# EAGLE board Untitled (EAGLE 7.2.0)
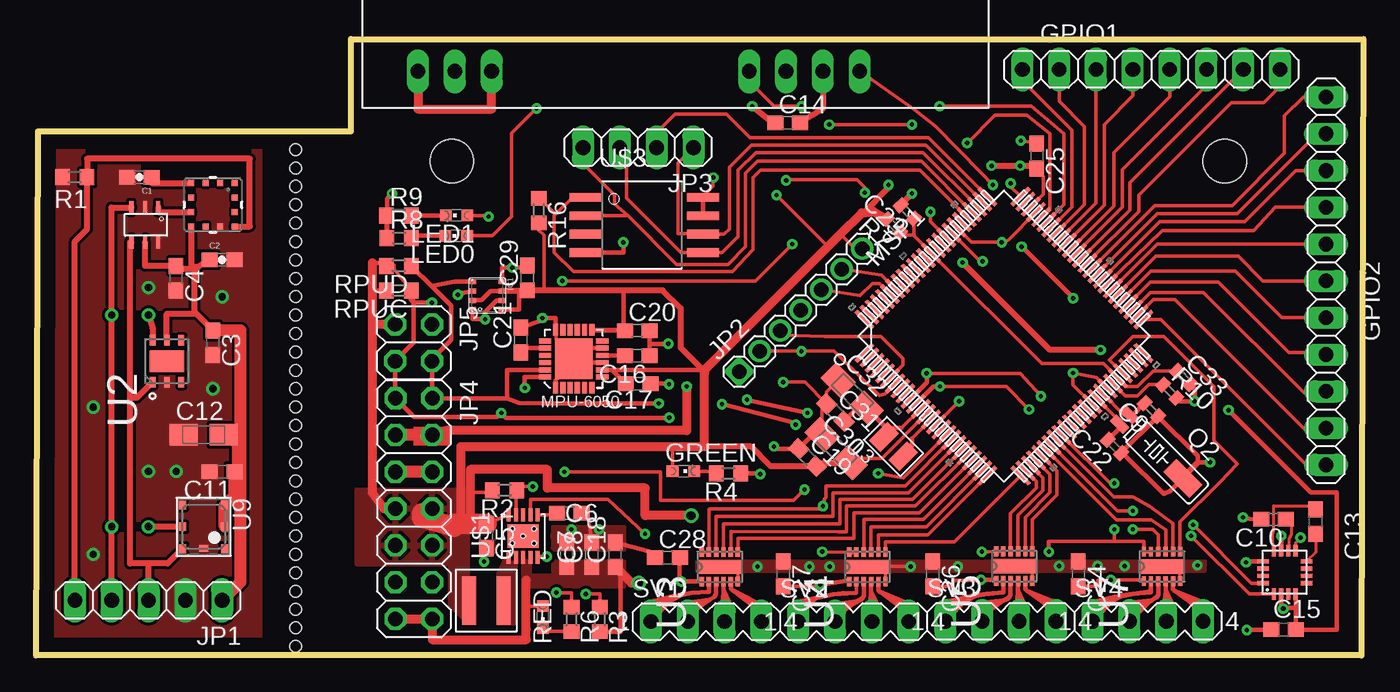
[diagram p0: board, top side]
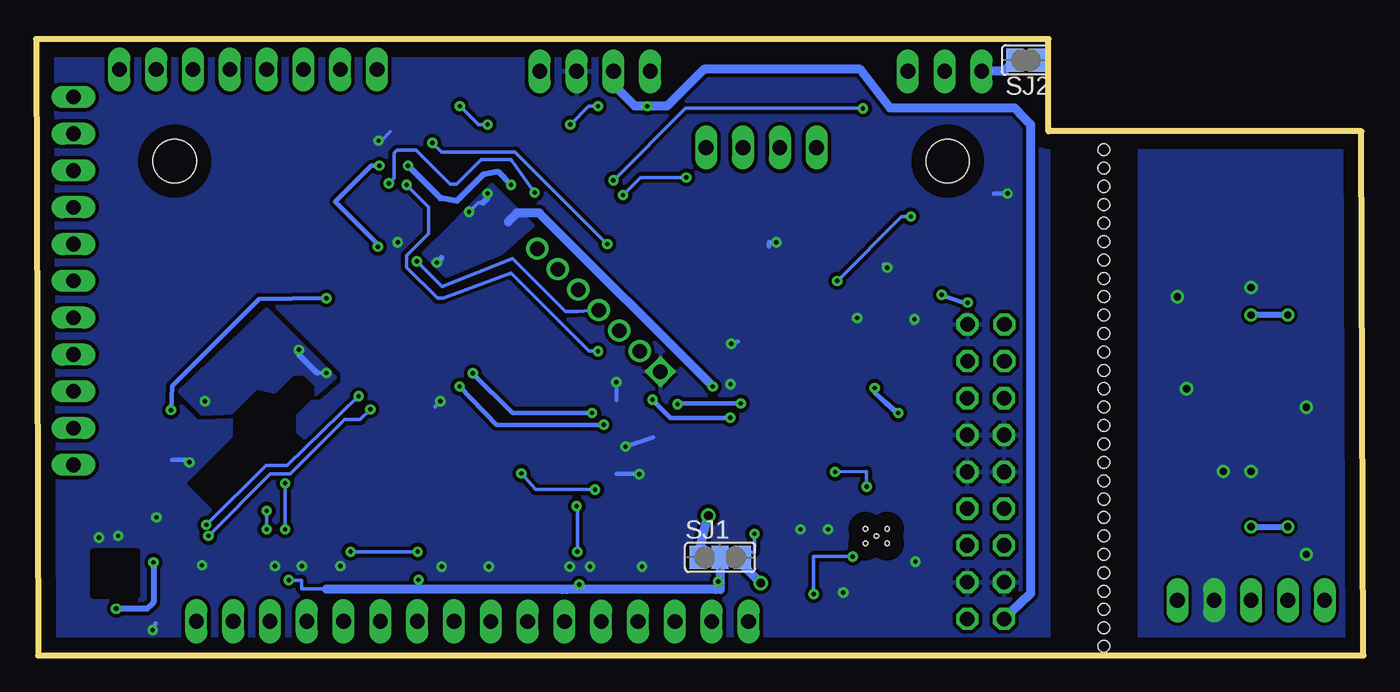
[diagram p1: board, bottom side, seen from below]

Size 91.57 x 42.54 mm. Coordinates in mm from the lower left corner, seen from the top.
Outline: 0,0 0.13,36.2 21.72,36.2 21.72,42.54 91.57,42.54 91.44,0 0,0
Copper layers (1*16): Top 0.035mm / dielectric 1.5mm / Bottom 0.035mm
Design rules "default": minimum track width 10mil, minimum drill 24mil, track to track 8mil, track to pad 8mil, pad to pad 8mil, via to via 8mil, smd to smd 8mil, copper to edge 40mil, drill to drill 8mil, minimum pad ring 10mil, minimum via ring 8mil, stop-mask expansion 4mil, vias tented up to drill 0mil, thermal gap 10mil
Net classes: 0 default: width 0.254 mm; 1 power: width 0.203 mm, drill 0.305 mm, clearance 0.152 mm; 2 VIN: width 0.203 mm, drill 0.305 mm, clearance 0.152 mm; 3 fine: width 0.406 mm, drill 0.61 mm, clearance 0.152 mm
Holes 3 mm at 28.68,34.11 82.02,34.11
Holes 0.8 mm at 17.91,0.64 17.91,1.91 17.91,3.17 17.91,4.45 17.91,5.71 17.91,6.98 17.91,8.26 17.91,9.53 17.91,10.79 17.91,12.06 17.91,13.33 17.91,14.61 17.91,15.88 17.91,17.15 17.91,18.42 17.91,19.69 17.91,20.96 17.91,22.23 17.91,23.5 17.91,24.77 17.91,26.04 17.91,27.31 17.91,28.58 17.91,29.85 17.91,31.12 17.91,32.38 17.91,33.66 17.91,34.92
bRestrict: area 84.6,4.2 to 87.6,7.2

## Footprints (pad centres in the part's own frame; a part is rotated, then mirrored left to right if it is on the bottom)
0603-CAP = smd 1.1 x 1: 1 -0.85,0; 2 0.85,0
C0603 = smd 1.1 x 1: 1 -0.85,0; 2 0.85,0
C0402 = smd 0.7 x 0.9: 1 -0.65,0; 2 0.65,0
A/3216-18R = smd 1.95 x 1.5: + 1.375,0; - -1.375,0
LPCC16 = smd 0.8 x 0.3: 1 -1.5,0.75; 2 -1.5,0.25; 3 -1.5,-0.25; 4 -1.5,-0.75; 9 1.5,-0.75; 10 1.5,-0.25; 11 1.5,0.25; 12 1.5,0.75 | smd 0.3 x 0.8: 5 -0.75,-1.5; 6 -0.25,-1.5; 7 0.25,-1.5; 8 0.75,-1.5; 13 0.75,1.5; 14 0.25,1.5; 15 -0.25,1.5; 16 -0.75,1.5
1X08 = drill 1.016 long: 1 -8.89,0; 2 -6.35,0; 3 -3.81,0; 4 -1.27,0; 5 1.27,0; 6 3.81,0; 7 6.35,0; 8 8.89,0
1X11 = drill 1.016 long: 1 -12.7,0; 2 -10.16,0; 3 -7.62,0; 4 -5.08,0; 5 -2.54,0; 6 0,0; 7 2.54,0; 8 5.08,0; 9 7.62,0; 10 10.16,0; 11 12.7,0
CHIPLED_0603 = smd 0.8 x 0.8: A 0,-0.75; C 0,0.75
BME280 = smd 0.35 x 0.5: 1 0.975,-1.025; 2 0.325,-1.025; 3 -0.325,-1.025; 4 -0.975,-1.025; 5 -0.975,1.025; 6 -0.325,1.025; 7 0.325,1.025; 8 0.975,1.025
1X05 = drill 1.016 long: 1 -5.08,0; 2 -2.54,0; 3 0,0; 4 2.54,0; 5 5.08,0
1:07X2MM = drill 1.016 pad 1.3 square: 1 0,0 | drill 1.016 pad 1.3: 2 4,0; 3 2,0; 4 6,0; 5 8,0; 6 10,0; 7 12,0
1X04 = drill 1.016 long: 1 -3.81,0; 2 -1.27,0; 3 1.27,0; 4 3.81,0
2X07 = drill 1.016 octagon: 1 -7.62,-1.27; 2 -7.62,1.27; 3 -5.08,-1.27; 4 -5.08,1.27; 5 -2.54,-1.27; 6 -2.54,1.27; 7 0,-1.27; 8 0,1.27; 9 2.54,-1.27; 10 2.54,1.27; 11 5.08,-1.27; 12 5.08,1.27; 13 7.62,-1.27; 14 7.62,1.27
2X02 = drill 1.016 octagon: 1 -1.27,-1.27; 2 -1.27,1.27; 3 1.27,-1.27; 4 1.27,1.27
XFL4020 = smd 0.965 x 3.353: P$1 -1.181,0; P$2 1.181,0
0806 = smd 1.1 x 1.8: 1 -0.94,0; 2 0.94,0
QFN24 = smd 0.8 x 0.35: 1 -2,1.25; 2 -2,0.75; 3 -2,0.25; 4 -2,-0.25; 5 -2,-0.75; 6 -2,-1.25; 13 2,-1.25; 14 2,-0.75; 15 2,-0.25; 16 2,0.25; 17 2,0.75; 18 2,1.25 | smd 0.35 x 0.85: 7 -1.25,-1.975; 8 -0.75,-1.975; 9 -0.25,-1.975; 10 0.25,-1.975; 11 0.75,-1.975; 12 1.25,-1.975; 19 1.25,1.975; 20 0.75,1.975; 21 0.25,1.975; 22 -0.25,1.975; 23 -0.75,1.975; 24 -1.25,1.975 | smd 2.8 x 2.6: P 0,0
PZ100 = smd 1.676 x 0.279: 1 -7.62,5.994; 2 -7.62,5.512; 3 -7.62,5.004; 4 -7.62,4.496; 5 -7.62,3.988; 6 -7.62,3.505; 7 -7.62,2.997; 8 -7.62,2.489; 9 -7.62,2.007; 10 -7.62,1.499; 11 -7.62,0.991; 12 -7.62,0.508; 13 -7.62,0; 14 -7.62,-0.508; 15 -7.62,-0.991; 16 -7.62,-1.499; 17 -7.62,-2.007; 18 -7.62,-2.489; 19 -7.62,-2.997; 20 -7.62,-3.505; 21 -7.62,-3.988; 22 -7.62,-4.496; 23 -7.62,-5.004; 24 -7.62,-5.512; 25 -7.62,-5.994; 51 7.62,-5.994; 52 7.62,-5.512; 53 7.62,-5.004; 54 7.62,-4.496; 55 7.62,-3.988; 56 7.62,-3.505; 57 7.62,-2.997; 58 7.62,-2.489; 59 7.62,-2.007; 60 7.62,-1.499; 61 7.62,-0.991; 62 7.62,-0.508; 63 7.62,0; 64 7.62,0.508; 65 7.62,0.991; 66 7.62,1.499; 67 7.62,2.007; 68 7.62,2.489; 69 7.62,2.997; 70 7.62,3.505; 71 7.62,3.988; 72 7.62,4.496; 73 7.62,5.004; 74 7.62,5.512; 75 7.62,5.994 | smd 0.279 x 1.676: 26 -5.994,-7.62; 27 -5.512,-7.62; 28 -5.004,-7.62; 29 -4.496,-7.62; 30 -3.988,-7.62; 31 -3.505,-7.62; 32 -2.997,-7.62; 33 -2.489,-7.62; 34 -2.007,-7.62; 35 -1.499,-7.62; 36 -0.991,-7.62; 37 -0.508,-7.62; 38 0,-7.62; 39 0.508,-7.62; 40 0.991,-7.62; 41 1.499,-7.62; 42 2.007,-7.62; 43 2.489,-7.62; 44 2.997,-7.62; 45 3.505,-7.62; 46 3.988,-7.62; 47 4.496,-7.62; 48 5.004,-7.62; 49 5.512,-7.62; 50 5.994,-7.62; 76 5.994,7.62; 77 5.512,7.62; 78 5.004,7.62; 79 4.496,7.62; 80 3.988,7.62; 81 3.505,7.62; 82 2.997,7.62; 83 2.489,7.62; 84 2.007,7.62; 85 1.499,7.62; 86 0.991,7.62; 87 0.508,7.62; 88 0,7.62; 89 -0.508,7.62; 90 -0.991,7.62; 91 -1.499,7.62; 92 -2.007,7.62; 93 -2.489,7.62; 94 -2.997,7.62; 95 -3.505,7.62; 96 -3.988,7.62; 97 -4.496,7.62; 98 -5.004,7.62; 99 -5.512,7.62; 100 -5.994,7.62
MS3V-T1R = smd 0.635 x 1.27: P1 -0.47,-4.43; P2 0.47,-4.43 | smd 1.27 x 2.54: P3 0,1.3
R0603 = smd 1 x 1.1: 1 -0.85,0; 2 0.85,0
R0402 = smd 0.7 x 0.9: 1 -0.65,0; 2 0.65,0
SJ_2 = smd 1.168 x 1.6: 1 -1.524,0; 2 0,0; 3 1.524,0
SJ = smd 1.168 x 1.6: 1 -0.762,0; 2 0.762,0
MA04-1 = drill 1.016 long: 1 -3.81,0; 2 -1.27,0; 3 1.27,0; 4 3.81,0
ML8511 = smd 0.4 x 0.4: 1 -1.5,-1.5; 2 -1.5,-0.5; 3 -1.5,0.5; 4 -1.5,1.5; 5 -0.5,1.5; 6 0.5,1.5; 7 1.5,1.5; 8 1.5,0.5; 9 1.5,-0.5; 10 1.5,-1.5; 11 0.5,-1.5; 12 -0.5,-1.5
DFN300X300X110-7N = smd 0.711 x 0.406: 1 -1.448,0.991; 2 -1.448,0; 3 -1.448,-0.991; 4 1.448,-0.991; 5 1.448,0; 6 1.448,0.991 | smd 1.499 x 2.388: 7 0,0
SON50P200X300X80-13N = smd 0.66 x 0.305: 1 -1.016,1.245; 2 -1.016,0.762; 3 -1.016,0.254; 4 -1.016,-0.254; 5 -1.016,-0.762; 6 -1.016,-1.245; 7 1.016,-1.245; 8 1.016,-0.762; 9 1.016,-0.254; 10 1.016,0.254; 11 1.016,0.762; 12 1.016,1.245 | smd 0.991 x 3.099: 13 0,0
BMP180 = smd 0.6 x 0.5: 1 1.5,1.45; 2 0,1.45; 3 -1.5,1.45; 4 -1.5,-1.45; 5 0,-1.45; 6 1.5,-1.45 | smd 0.5 x 0.6: 7 1.5,0
S-PVSON-N10 = smd 0.28 x 0.825: 1 -1,-1.462; 2 -0.5,-1.462; 3 0,-1.462; 4 0.5,-1.462; 5 1,-1.462; 6 1,1.462; 7 0.5,1.462; 8 0,1.462; 9 -0.5,1.462; 10 -1,1.462 | smd 2.15 x 1.6: EXPAD 0,0 | hole 0.3: -0.75,0.5; 0.75,0.5; 0.75,-0.5; -0.75,-0.5; 0,0
STAR = smd 0.152 x 0.305: AGND 0.635,-0.635; DGND 0.635,0.635 | smd 0.305 x 0.152: GND 0.635,0
SOIC_8-LEAD = smd 0.61 x 2.21: CE -1.905,-2.934; RST/HOLD -0.635,5.156; SCK 0.635,5.156; SI 1.905,5.156; SO -0.635,-2.934; VDD -1.905,5.156; VSS 1.905,-2.934; WP 0.635,-2.934
HX1 = drill 1.016 long: 0V 13.97,0; EN 8.89,0; RFGND -13.97,0; RFGND2 -8.89,0; RFOUT -11.43,0; TXD 16.51,0; VCC 11.43,0
SOT-23-6 = smd 0.305 x 0.9: SCL 2.45,-0.45; SDA 2.45,1.95; VDD 1.5,1.95; VIN+ 0.6,-0.45; VIN- 0.6,1.95; VSS 1.5,-0.45

## Placement (x,y rotation side)
C1  1nF  [0603-CAP]  7.11,33.02 180 top
C2  0.1uF  [0603-CAP]  12.83,27.31 0 top
C3  100n  [C0603]  12.19,21.59 270 top
C4  100n  [C0603]  9.65,26.04 270 top
C5  22uF  [C0603]  31.06,8.24 270 top
C6  10nF  [C0603]  36.77,9.82 0 top
C7  22uF  [C0603]  36.6,6.97 90 top
C8  22uF  [C0603]  38.35,6.97 90 top
C9  12p  [C0402]  76.94,16.97 135 top
C10  4.7u  [C0603]  85.38,9.4 180 top
C11  100n  [C0603]  12.83,12.7 180 top
C12  10u  [A/3216-18R]  11.56,15.24 0 top
C13  220n  [C0603]  88.28,9.25 270 top
C14  100n  [C0603]  51.85,36.77 0 top
C15  100n  [C0603]  86.07,1.78 0 top
C16  100n  [C0603]  41.48,20.7 180 top
C17  10n  [C0603]  41.53,18.77 180 top
C18  3 x 22uF  [C0603]  39.95,6.97 90 top
C19  100n  [C0603]  53.21,13.67 315 top
C20  100n  [C0603]  41.48,22.43 0 top
C21  2.2n  [C0603]  33.45,21.78 90 top
C22  12p  [C0402]  74.4,14.43 135 top
C23  100n  [C0402]  60.11,30.62 135 top
C24  470n  [C0603]  71.91,5.64 270 top
C25  100n  [C0603]  69.04,34.47 270 top
C26  470n  [C0603]  61.85,5.64 270 top
C27  470n  [C0603]  51.54,5.64 270 top
C28  470n  [C0603]  43.56,6.76 0 top
C29  100n  [C0603]  33.9,26.06 90 top
C30  10u  [A/3216-18R]  55.19,14.27 315 top
C31  100n  [C0603]  55.14,16.76 315 top
C32  10u  [A/3216-18R]  56.31,18.03 315 top
C33  100n  [C0402]  79.16,19.19 315 top
COMPASS  HMC5883L  [LPCC16]  86.14,5.75 90 top
GPIO1  A7:A0  [1X08]  76.94,40.46 0 top
GPIO2  A18:A8  [1X11]  89,25.86 270 top
GREEN  3V-ok  [CHIPLED_0603]  44.65,12.73 270 top
IC1  BME280  [BME280]  31.13,24.84 270 top
JP1  [1X05]  7.75,3.81 180 top
JP2  [1:07X2MM]  48.51,19.6 45 top
JP3  SPI  [1X04]  41.54,35.06 180 top
JP4  [2X07]  26.05,10.14 270 top
JP5  [2X02]  26.04,21.59 270 top
L1  1uH  [XFL4020]  31.06,3.79 0 top
L3  4.7uH  [0806]  59.16,14.43 315 top
LED0  LED0  [CHIPLED_0603]  28.98,28.98 90 top
LED1  LED1  [CHIPLED_0603]  29.01,30.38 90 top
MPU-6050  MPU-6050  [QFN24]  37.08,20.47 90 top
MSP1  MSP432  [PZ100]  66.78,22.05 45 top
Q2  32.768kHz  [MS3V-T1R]  78.21,13.16 225 top
R1  10k  [R0603]  2.67,33.02 180 top
R2  1M  [R0603]  32.33,11.41 180 top
R3  1M  [R0603]  38.89,2.49 270 top
R4  1k  [R0603]  47.78,12.57 180 top
R6  1k  [R0603]  36.93,2.51 270 top
R7  0R  [R0402]  59.16,29.67 135 top
R8  1k  [R0603]  25.04,28.8 0 top
R9  1k  [R0603]  25.02,30.38 0 top
R10  91k 0.1% ±25 ppm/°C  [R0402]  78.21,18.24 315 top
R16  10k  [R0603]  34.68,30.72 270 top
RED  5V-ok  [CHIPLED_0603]  34.94,2.65 180 top
RPUC  10k  [R0603]  25.02,25.2 180 top
RPUD  10k  [R0603]  25.02,26.9 180 top
SJ1  3V3 V_Motor 5V  [SJ_2]  44.37,6.78 0 bottom
SJ2  [SJ]  23.28,41.1 180 bottom
SV1  [MA04-1]  46.23,2.34 0 top
SV2  [MA04-1]  56.39,2.34 0 top
SV3  [MA04-1]  66.55,2.36 0 top
SV4  [MA04-1]  76.71,2.36 0 top
U1  ML8511-UV-SENSOR  [ML8511]  12.19,31.12 180 top
U2  SHT21  [DFN300X300X110-7N]  9.02,20.32 90 top
U3  DRV8836DSSR  [SON50P200X300X80-13N]  47.17,6.12 90 top
U4  DRV8836DSSR  [SON50P200X300X80-13N]  57.35,6.12 90 top
U5  DRV8836DSSR  [SON50P200X300X80-13N]  67.49,6.17 90 top
U7  DRV8836DSSR  [SON50P200X300X80-13N]  77.67,6.15 90 top
U9  BMP180  [BMP180]  11.56,8.89 270 top
U$1  TPS61232  [S-PVSON-N10]  33.6,8.24 0 top
U$2  STARGND  [STAR]  27.3,14.5 90 top
U$3  SST25VF064C  [SOIC_8-LEAD]  40.85,29.72 270 top
U$4  HX1  [HX1]  40.31,40.33 0 top
U$5  MCP3425  [SOT-23-6]  9.02,30.48 180 top

## Library data of the parts
C1 = SparkFun-Capacitors; PROD_ID: CAP-07886
C2 = SparkFun-Capacitors; PROD_ID: CAP-00810
C3-C11 C13-C33 R2-R4 R6-R10 R16 RPUC RPUD = rcl
C12 R1 = resistor
COMPASS = HMC5883L
GPIO1 GPIO2 JP3-JP5 = pinhead
GREEN LED0 LED1 RED = adafruit
IC1 = bosch-bme280
JP1 JP2 = Headerlibrary
L1 = Coilcraft; URL: http://www.coilcraft.com/xfl4020.cfm
L3 = Murata
MPU-6050 = seb
MSP1 = MSP-EXP432
Q2 = microcrystal
SJ1 SJ2 = jumper
SV1-SV4 = con-lstb; OC_FARNELL: unknown; OC_NEWARK: unknown
U1 = ML8511
U2 = SENSIRION-SHT21; MPN: SHT21; OC_FARNELL: 1855468; OC_NEWARK: 20T1172; PACKAGE: DFN-6; SUPPLIER: SENSIRION
U3-U5 U7 = DRV8834; MPN: DRV8836DSSR; OC_FARNELL: 2115236; OC_NEWARK: 94T6066; PACKAGE: SON-12; SUPPLIER: TEXAS INSTRUMENTS
U9 = SparkFun-Sensors
U$1 = texasinstruments
U$2 = lpatiny
U$3 = BertaLib
U$4 = Octanis1
U$5 = phMeter

## Nets
3.3V [power]: U$3.WP
5VEN: MSP1.17 R2.1 U$1.9
+3V1 [power]: C5.1 C15.2 C17.2 C19.2 C20.1 C25.2 C29.1 C30.+ COMPASS.2 COMPASS.4 COMPASS.13 GREEN.A IC1.2 IC1.6 IC1.8 JP2.7 JP4.7 JP4.8 JP4.9 JP4.10 JP5.1 L1.P$1 MPU-6050.8 MPU-6050.13 MSP1.13 MSP1.73 R2.2 R7.2 R16.2 RPUC.2 RPUD.2 SJ1.1 U$1.10 U$3.RST/HOLD U$3.VDD
+3V3 [power]: C2.1 C3.1 C4.1 C11.1 C12.+ JP1.1 U1.7 U2.5 U9.2 U9.3 U$5.VDD
+5V [fine]: C7.1 C8.1 C14.1 C18.1 JP4.13 JP4.14 R3.2 RED.A SJ1.3 U$1.3 U$1.4 U$1.7 U$4.VCC
A14: GPIO2.7 MSP1.55
A15: GPIO2.8 MSP1.54
A16: GPIO2.9 MSP1.53
A17: GPIO2.10 MSP1.52
A18: GPIO2.11 MSP1.51
A19: MSP1.50
A20: MSP1.49
A21: MSP1.48
A22: MSP1.47
AGND [power]: C23.2 C33.2 MSP1.40 MSP1.43 MSP1.84 R10.2 U$2.AGND
AVCC1 [VIN]: C23.1 C33.1 MSP1.45 MSP1.87 R7.1
GND: C1.2 C2.2 C3.2 C4.2 C11.2 C12.- JP1.2 R1.2 U1.5 U2.2 U9.7 U$5.VIN- U$5.VSS
GND1 [power]: C5.2 C6.2 C7.2 C8.2 C9.1 C10.2 C14.2 C15.1 C16.1 C17.1 C18.2 C19.1 C20.2 C21.2 C22.1 C24.1 C25.1 C26.1 C27.1 C28.1 C29.2 C30.- C31.1 C32.- COMPASS.9 COMPASS.11 IC1.1 IC1.5 IC1.7 JP2.1 JP4.3 JP4.4 JP4.5 JP4.6 JP4.11 JP4.12 JP5.2 MPU-6050.1 MPU-6050.9 MPU-6050.11 MPU-6050.18 MPU-6050.P MSP1.15 MSP1.72 MSP1.82 Q2.P3 R4.1 R6.1 R8.1 R9.1 SJ2.1 U3.6 U3.13 U4.6 U4.13 U5.6 U5.13 U7.6 U7.13 U$1.EXPAD U$2.DGND U$2.GND U$3.VSS U$4.0V
HX1_EN: MSP1.70 U$4.EN
IND: L1.P$2 U$1.1 U$1.2
LED0: LED0.A MSP1.75
LED1: LED1.A MSP1.71
M1IN1: MSP1.19 U3.10
M1IN2: MSP1.20 U3.9
M2IN1: MSP1.21 U3.8
M2IN2: MSP1.22 U3.7
M3IN1: MSP1.23 U4.10
M3IN2: MSP1.24 U4.9
M4IN1: MSP1.25 U4.8
M4IN2: MSP1.26 U4.7
M5IN1: MSP1.27 U5.10
M5IN2: MSP1.28 U5.9
M6IN1: MSP1.29 U5.8
M6IN2: MSP1.30 U5.7
M7IN1: MSP1.32 U7.10
M7IN2: MSP1.31 U7.9
M8IN1: MSP1.33 U7.8
M8IN2: MSP1.46 U7.7
M1234SLEEP: MSP1.18 U3.11 U3.12 U4.11 U4.12
M5678SLEEP: MSP1.34 U5.11 U5.12 U7.11 U7.12
N$1: U1.8 U$5.VIN+
N$2: R3.1 U$1.5
N$3: C1.1 U1.10
N$4: GREEN.C R4.2
N$5: LED0.C R8.2
N$6: LED1.C R9.2
N$7: C31.2 C32.+ L3.1 MSP1.12
N$8: C22.2 MSP1.41 Q2.P2
N$10: C9.2 MSP1.42 Q2.P1
N$13: SV2.1 U4.2
N$14: GPIO2.1 MSP1.61
N$15: GPIO2.2 MSP1.60
N$17: C10.1 COMPASS.10
N$18: C16.2 MPU-6050.10
N$19: C21.1 MPU-6050.20
N$20: GPIO2.3 MSP1.59
N$21: GPIO2.4 MSP1.58
N$22: GPIO2.5 MSP1.57
N$23: GPIO2.6 MSP1.56
N$25: C13.2 COMPASS.8
N$27: GPIO1.1 MSP1.69
N$28: GPIO1.2 MSP1.68
N$30: GPIO1.3 MSP1.67
N$32: C13.1 COMPASS.12
N$33: MSP1.44 R10.1
N$34: L3.2 MSP1.14
N$35: GPIO1.4 MSP1.66
N$36: GPIO1.5 MSP1.65
N$37: GPIO1.6 MSP1.64
N$38: GPIO1.8 MSP1.62
N$39: SV2.2 U4.3
N$40: SV2.3 U4.4
N$41: SV2.4 U4.5
N$42: C6.1 U$1.6
N$43: GPIO1.7 MSP1.63
N$44: R6.2 RED.C
N$45: SV3.1 U5.2
N$46: SV3.2 U5.3
N$47: SV3.3 U5.4
N$48: SV3.4 U5.5
N$49: SV1.1 U3.2
N$50: SV1.2 U3.3
N$51: SV1.3 U3.4
N$52: SV1.4 U3.5
N$53: SV4.1 U7.2
N$54: SV4.2 U7.3
N$55: SV4.3 U7.4
N$56: SV4.4 U7.5
N$75: JP2.4 MSP1.83
N$76: JP2.6 MSP1.94
N$77: JP2.5 MSP1.95
P1.0/UCA0STE: MSP1.4
P1.1/UCA0CLK: MSP1.5
P1.4/UCB0STE: MSP1.8
P1.5/UCB0CLK: MSP1.9
P2.0/PM_UCA1STE: MSP1.16
P3.3/PM_UCA2TXD/PM_UCA2SIMO: MSP1.35
P3.4/PM_UCB2STE: MSP1.36
P3.5/PM_UCB2CLK: MSP1.37
P3.6/PM_UCB2SIMO/PM_UCB2SDA: MSP1.38
P3.7/PM_UCB2SOMI/PM_UCB2SCL: MSP1.39
P6.7/TA2.4/UCB3SOMI/UCB3SCL/C1.0: MSP1.81
P7.0/PM_SMCLK/PM_DMAE0: MSP1.88
P7.1/PM_C0OUT/PM_TA0CLK: MSP1.89
P7.2/PM_C1OUT/PM_TA1CLK: MSP1.90
P7.3/PM_TA0.0: MSP1.91
P9.2/TA3.3: MSP1.74
P9.4/UCA3STE: MSP1.96
P9.5/UCA3CLK: MSP1.97
P9.6/UCA3RXD/UCA3SOMI: MSP1.98
P9.7/UCA3TXD/UCA3SIMO: MSP1.99
P10.0/UCB3STE: MSP1.100
P10.1/UCB3CLK: MSP1.1
P10.2/UCB3SIMO/UCB3SDA: MSP1.2
P10.3UCB3SOMI/UCB3SCL: MSP1.3
PJ.2/HFXOUT: MSP1.85
PJ.3/HFXIN: MSP1.86
PJ.4/TDI/ADC14CLK: MSP1.92
PJ.5/TDO/SWO: MSP1.93
RFGND [power]: SJ2.2 U$4.RFGND U$4.RFGND2
RX: JP2.2 MSP1.6
SCL: JP1.4 U2.6 U9.5 U$5.SCL
SCL1: COMPASS.1 IC1.4 JP4.2 JP5.4 MPU-6050.23 MSP1.11 RPUD.1
SDA: JP1.3 U2.1 U9.6 U$5.SDA
SDA1: COMPASS.16 IC1.3 JP4.1 JP5.3 MPU-6050.24 MSP1.10 RPUC.1
SPI_EXTSLAVE_TE: JP3.2 MSP1.76
SPI_FLASH_CS: MSP1.80 R16.1 U$3.CE
SPI_MISO: JP3.4 MSP1.79 U$3.SO
SPI_MOSI: JP3.3 MSP1.78 U$3.SI
SPI_SCK: JP3.1 MSP1.77 U$3.SCK
TX: JP2.3 MSP1.7 U$4.TXD
UV_EN: JP1.5 R1.1 U1.4
V_MOTOR [fine]: C24.2 C26.2 C27.2 C28.2 SJ1.2 U3.1 U4.1 U5.1 U7.1

## Tracks (layer width: path | path; a pad name or v marks a point on that pad's centre or on a via)
5VEN  (via drill 0.3)
  Top 0.254: U$1.9 33.1,11.41 R2.1 33.18,11.66 v34.27,11.66 | 36.55,12.72 v36.45,12.67 43.07,12.67 43.07,10.69 52.25,10.69 v53.01,11.46 | MSP1.17 59.84,12.27 v58.09,12.57
  Bottom 0.254: v36.45,12.67 34.27,12.72 v34.27,11.66 | v58.09,12.57 57.12,11.46 v53.01,11.46
+3V1  (via drill 0.3, 0.6)
  Top 0.254: C5.1 U$1.10 | R2.2 31.48,11.25 29.95,11.25 | GREEN.A 43.9,14.39 43.87,14.43 | MSP1.13 58.34,13.61 56.48,13.61 arc90 C30.+ | U$3.RST/HOLD 46,31.67 46.71,32.38 v46.71,32.99 | v51.08,31.78 | v51.08,31.78 54.62,28.23 | JP2.7 56.5,28.08 55.49,29.09 | R7.2 58.27,30.56 57.07,30.56 | MSP1.73 69.49,31.84 69.49,33.06 C25.2 | 54.05,13.3 arc90 C19.2 | 34.89,25.21 35.03,25.35 35.03,29.03 34.68,29.38 R16.2
  Top 0.305: U$3.RST/HOLD U$3.VDD | C20.1 38.38,22.43 MPU-6050.13 40.51,22.47 40.51,25.21 37.86,25.21 34.89,25.21 | C17.2 39.73,19.72 MPU-6050.8 | MPU-6050.8 39.07,19.74 | COMPASS.4 86.89,3.28 | 86.89,3.28 86.89,1.81 C15.2 89.74,1.78 89.74,11.25 87.96,11.25 v82.27,16.94 | COMPASS.2 85.89,3.41 v86.07,3.23 | v83.48,6.43 83.48,6.5 COMPASS.13 | v86.02,3.23 86.02,3.28 86.89,3.28 | 24.15,26.9 RPUD.2 23.97,27.1 23.19,27.1 | RPUC.2 24.17,24.96 23.78,25.2 23.19,25.2 | IC1.6 31.35,25.17 30.72,24.54 30.12,24.54 IC1.2 | IC1.8 33.31,23.87 33.31,25.17 | 45.87,19.84 46.13,19.58 | MPU-6050.8 46.13,19.72 46.13,19.48 | v71.55,24.66 v68,28.22
  Top 0.406: C20.1 40.72,22.52 | IC1.6 33.31,25.17 33.65,25.17 C29.1 40.51,25.21 43.22,25.21 44.48,23.95 44.48,21.23 45.87,19.84 45.87,19.81 45.95,19.74 | 57.07,30.56 58.8,32.28 v58.8,32.49 | v65.91,33.81 v67.89,33.81 69.05,33.81 C25.2 | C19.2 50.68,13.06 49.31,14.43 46.13,14.43 | 54.05,13.3 C30.+
  Top 0.61: v45.19,9.66 42.01,9.66 42.01,11.57 35.27,11.57 35.27,12.84 29.95,12.84 29.95,11.25 29.95,9.09 29.31,9.09 | 28.68,9.35 29.31,9.35 29.31,14.43 43.87,14.43 46.13,14.43 46.13,19.48 46.13,19.58 46.13,19.71 54.62,28.23 55.49,29.09 56.97,30.56 57.76,30.66 R7.2 | 23.19,22.12 23.19,11.23 23.97,10.14 JP4.7 | 23.19,27.1 23.19,25.2 23.19,22.12 | JP5.1 23.29,22.86 23.19,22.12
  Top 1.422: C5.1 29.31,9.09 28.83,9.09 28.83,8.87 26.61,9.51 26.61,9.82
  Bottom 0.254: v46.71,32.99 49.86,32.99 v51.08,31.78
  Bottom 0.305: v86.07,3.23 v86.02,3.23 | v82.27,16.94 82.17,18.62 76.17,24.61 v71.55,24.66 | v68,28.22 67.89,28.32 67.94,28.32 70.94,31.32 68.45,33.81 v67.89,33.81
  Bottom 0.406: v83.48,6.43 83.48,3.69 83.93,3.23 v86.07,3.23 | v58.8,32.49 59.72,33.4 60.73,33.2 62.56,31.37 63.68,31.57 v65.91,33.81
  Bottom 0.61: SJ1.1 45.44,8.71 v45.19,9.66
  pour Top: 22.17,11.41 29.79,11.41 28.52,6.33 22.17,6.33
  pour Top (no thermals): 29.79,2.2 29.79,9.51 28.52,10.14 28.52,3.47
+3V3
  Top 0.406: C12.+ 13.68,14.49 C11.1 | U$5.VDD 7.52,26.89 C4.1 9.65,26.67 10.92,26.67 | C2.1 11.2,26.84 | 11.2,26.84 10.92,26.67 | U1.7 10.69,26.84 11.2,26.84 | C3.1 11.03,23.6 | 11.03,23.6 10.92,23.71 10.92,26.67 | U2.5 9.02,23.6 11.03,23.6
  Top 0.61: 12.83,15.24 14.1,15.24
  Top 0.813: JP1.1 14.1,5.08 14.1,15.24 | 14.1,15.24 C12.+ 12.83,15.24 | U9.2 U9.3 13.68,11.06 C11.1 | 14.1,15.24 14.1,22.44 C3.1
+5V  (via drill 0.3, 0.6)
  Top 0.254: U$1.7 34.1,10.78 39.47,10.78 v42.01,8.39 | 33.81,1.83 33.87,3.4 RED.A
  Top 0.305: R3.2 40.3,1.64 40.3,5.76
  Top 0.406: v49.4,37.92 50.76,36.8 C14.1
  Top 0.61: JP4.13 JP4.14 27.32,1.09 33.81,1.09 33.81,1.83 33.81,5.22 | C18.1 40.3,5.76 41.06,5 v41.58,5
  Bottom 0.254: v42.01,8.39 42.01,7.12 42.39,7.12 SJ1.3
  Bottom 0.406: 50.27,37.92 50.27,37.87 v49.4,37.92
  Bottom 0.61: JP4.13 arc90 24.31,3 22.96,4.27 22.96,36.65 24.05,37.79 32.63,37.79 34.71,40.46 45.5,40.46 48.04,37.92 50.27,37.92 51.74,39.39 U$4.VCC | v41.58,5 42.85,6.27 SJ1.3
  pour Top (no thermals): 40.58,6.49 35.66,6.49 35.66,5.54 34.07,5.54 34.07,6.97 33.6,6.97 33.6,4.74 40.58,4.74
A14
  Top 0.254: GPIO2.7 85.95,23.32 82.73,26.54 76.91,26.54 MSP1.55
A15
  Top 0.254: MSP1.54 76.87,25.78 81.56,25.78 86.44,20.9 88.88,20.9 GPIO2.8
A16
  Top 0.254: GPIO2.9 87.53,18.24 87.45,18.16 80.54,25.07 76.88,25.07 MSP1.53
A17
  Top 0.254: GPIO2.10 88.88,15.57 87.55,15.57 78.56,24.56 77.09,24.56 MSP1.52
A18
  Top 0.254: GPIO2.11 87.63,13.16 77.59,23.2 MSP1.51
AGND  (via drill 0.3)
  Top 0.254: MSP1.40 71.54,18.69 v71.54,19.51 73.15,19.19 MSP1.43 | MSP1.84 61.7,29.96 v61.7,30.62
  Top 0.305: R10.2 78.89,17.55 v79.93,17.55 79.93,18.42 C33.2
  Top 0.406: v73.44,21.1 69.95,21.1 v63.92,27.13 | C23.2 59.65,31.11 v60.43,31.89
  Top 0.61: v44.88,18.57 44.88,15.52 28.32,15.52 arc90 U$2.AGND
  Bottom 0.254: v71.54,19.51 72.17,19.51 | v61.7,30.62 61.06,31.26 60.74,31.26
  Bottom 0.305: v79.93,17.55 80.14,17.55
  Bottom 0.406: 72.17,19.51 73.44,20.78 v73.44,21.1 | v63.92,27.13 63.6,27.45 | v60.43,31.89 60.43,31.57 60.74,31.26
  Bottom 0.61: v44.88,18.57 56.87,30.56 58.4,30.56 59,29.95
  pour Bottom: 75.67,23.95 81.7,18.24 80.11,16.65 73.44,16.97 70.9,19.19
  pour Bottom: 60.11,32.52 64.87,27.76 63.28,26.17 59.47,27.76 57.25,29.67
AVCC1
  Top 0.254: C33.1 77.08,19.65 75.98,18.56 75.23,18.56 MSP1.45 73.64,20.14 69.4,20.14 MSP1.87 60.57,28.97 60.57,29.03 | 60.57,29.03 C23.1 | R7.1 59.79,29.03 60.57,29.03
GND  (via drill 0.5)
  other vias: 7.75,25.4 12.83,24.77 12.19,18.42 9.65,12.7 7.75,12.7 3.94,6.98 3.94,17.15
  pour Top (no thermals): 0.13,0 0.13,35.56 15.37,35.56 15.37,0
  pour Bottom (no thermals): 0.13,0 0.13,35.56 15.37,35.56 15.37,0
GND1  (via drill 0.3)
  Top 0.203: 78.94,5.18 U7.6 | 48.39,6.07 47.17,6.07 U3.13 | 68.66,6.1 67.59,6.1 U5.13 | 77.72,6.1 U7.13 | COMPASS.9 86.89,7.79 v87.24,8.13
  Top 0.254: v60.34,6.15 58.75,6.15 arc90 58.6,5.99 U4.6 | U5.6 68.73,6.02 arc90 68.66,6.1 | U7.6 78.92,6.16 arc-90 78.93,6.17 77.7,6.17 arc90 U7.13 | U3.6 48.41,6.04 arc90 48.39,6.07 | C6.2 38.04,9.82 C8.2 | v30.9,6.49 30.9,7.44 | R6.1 36.93,4.34 v35.89,4.34 | 35.83,18.97 36.09,19.23 | MPU-6050.18 35.89,21.86 36.2,21.67 | MSP1.82 64.54,28.52 v66.62,28.52 | MSP1.72 67.1,28.73 66.73,28.42 v66.62,28.52 | 66.52,28.63 v66.62,28.52 | C25.1 69.02,35.37 v67.94,35.53 | MSP1.15 v63.68,17.55 | C31.1 53.04,18.87 v51.54,18.87 | C32.- 54.54,18.21 C31.1 | C31.1 54.22,17.05 C30.-
  Top 0.305: C28.1 42.29,7.18 C18.2 | COMPASS.11 85.89,8.19 v85.91,8.26 | v87.25,8.15 v87.24,8.13 | MPU-6050.18 35.83,23.29 v34.93,23.29 34.88,23.13 C21.2 | C10.2 83.69,9.43 v83.27,9.53 | MPU-6050.1 35.83,18.97 | 36.09,19.23 36.09,19.48 MPU-6050.P 37.54,20.47 37.57,20.45 | MPU-6050.9 37.59,20.22 37.57,20.24 37.57,20.45 | 37.57,20.45 37.57,21.16 | 37.57,21.16 37.57,21.22 MPU-6050.11 | 36.2,21.67 37.06,21.67 37.57,21.16 | C20.2 C16.1 42.33,21.5 42.34,21.51 v43.61,21.51 | C17.1 43.61,18.77 v43.66,18.72 | C15.1 85.27,1.76 v83.53,1.76 | IC1.5 32.15,26.77 v32.86,26.77 33.95,26.77 C29.2 | IC1.1 30.1,23.22 v30.97,23.22 30.97,23.72 31.77,24.52 IC1.7 | U$3.VSS 40.51,27.81 v40.51,28.52 | C22.1 C9.1 80.14,13.77 80.14,13.39 79.13,12.38 Q2.P3 | Q2.P3 78.24,11.35 77.8,11.15 75.06,13.89 74.95,14.1 | Q2.P3 80.22,13.33 v81,13.33 | C30.- 53.59,15.25 C19.1 51.06,14.27 v50.9,14.43 | R4.1 49.9,12.57 v49.95,12.52 | R9.1 24.17,28.83 R8.1 24.19,31.54 v24.55,31.89
  Top 0.406: U$4.0V 54.28,37.71 C14.2
  Top 0.61: JP4.4 arc90 27.3,15.2 U$2.GND U$2.DGND
  Top 0.813: JP4.4 JP4.3 | JP4.6 JP4.5
  Bottom 0.254: v35.89,4.34 36.04,4.55 36.09,4.55 | v66.62,28.52 66.42,28.73 66.73,28.73 | v67.94,35.53 67.74,35.53 67.13,36.14 | v63.68,17.55 64.03,17.2 64.03,17.15 | v51.54,18.87 51.54,17.6
  Bottom 0.305: v85.91,8.26 85.76,8.16 86.12,8.11 | v34.93,23.29 34.67,23.29 | v43.61,21.51 43.16,21.67 | v43.66,18.72 43.87,18.72 43.92,18.67 | v83.53,1.76 83.43,1.96 83.32,2.22 | v32.86,26.77 33.01,26.98 33.06,26.98 | v30.97,23.22 30.97,22.96 31.08,22.96 | v40.51,28.52 41.02,28.52 41.02,28.22 | v81,13.33 81.15,13.49 82.17,13.49 | v50.9,14.43 49,15.06 | v49.95,12.52 51.54,12.52 | v24.55,31.89 25.5,31.89
  other vias: 49.77,6.15 54.75,6.15 53.35,6.15 63.59,6.15 70.59,6.17 75.1,6.17 73.24,6.17 36.93,8.71 38.84,8.71 80.12,6.22
  pour Bottom (isolate 0.254, rank 2): 21.72,42.54 91.18,42.37 91.44,-0.03 21.72,0.64
  pour Top (no thermals): 30.74,7.92 31.69,7.92 32.65,8.87 40.58,8.87 40.58,7.28 35.5,7.28 34.55,7.6 32.33,7.6 31.38,6.97 30.74,6.97
  pour Top (no thermals): 45.64,5.83 80.61,5.85 80.63,6.49 45.64,6.46
HX1_EN  (via drill 0.3)
  Top 0.254: MSP1.70 70.9,31.13 70.9,36.02 68.68,37.92 v62.33,37.92 | v60.43,36.65 v54.71,36.65 | v52.81,37.92 50.9,37.92 49.2,39.62 U$4.EN
  Bottom 0.254: v62.33,37.92 61.06,36.65 v60.43,36.65 | v54.71,36.65 53.44,37.92 v52.81,37.92
IND
  pour Top (no thermals): 33.12,6.97 33.12,2.2 31.85,2.2 31.85,5.7 32.49,6.97
LED0  (via drill 0.3)
  Top 0.254: MSP1.75 67.23,32.37 v67.23,32.59 | v51.74,32.79 51.79,32.84 56.62,32.84 57.18,32.28 v57.18,31.95 | v34.52,37.77 32.8,36.05 32.8,30.3 31.48,28.98 LED0.A
  Bottom 0.254: v67.23,32.59 66.88,32.94 66.88,34.67 66.67,34.87 65.35,34.87 63.02,32.54 62.56,32.54 60.88,34.21 58.8,34.21 v57.18,31.95 | v51.74,32.79 46.76,37.77 v34.52,37.77
LED1  (via drill 0.3)
  Top 0.254: MSP1.71 69.95,30.86 69.95,36.02 68.36,37.29 66.14,37.29 v64.24,35.38 | v52.17,28.4 49.63,25.86 v36.3,25.86 | v31.22,30.3 31.14,30.38 LED1.A
  Bottom 0.254: v64.24,35.38 63.6,34.75 58.52,34.75 v52.17,28.4 | v36.3,25.86 31.85,30.3 v31.22,30.3
M1IN1
  Top 0.254: U3.10 46.91,9.6 54.99,9.6 54.99,11.23 60.2,11.23 MSP1.19
M1IN2
  Top 0.254: U3.9 47.42,9.09 55.45,9.09 55.45,10.77 60.46,10.77 MSP1.20
M2IN1
  Top 0.254: U3.8 47.93,8.59 55.35,8.53 55.91,8.53 55.91,10.31 60.68,10.31 MSP1.21
M2IN2
  Top 0.254: U3.7 48.41,8.08 56.41,8.08 56.41,9.86 60.94,9.86 MSP1.22
M3IN1
  Top 0.254: U4.10 arc90 57.1,7.19 57.1,9.4 61.2,9.4 MSP1.23
M3IN2
  Top 0.254: U4.9 57.61,8.89 61.41,8.89 MSP1.24
M4IN1
  Top 0.254: U4.8 58.12,8.33 61.54,8.33 MSP1.25
M4IN2
  Top 0.254: U4.7 58.62,7.14 58.6,7.85 63.35,7.85 MSP1.26
M5IN1
  Top 0.254: U5.10 67.23,9.8 69,11.57 69,12.03 MSP1.27
M5IN2
  Top 0.254: MSP1.28 69.47,12.27 69.47,11.41 67.73,9.66 67.73,7.2 U5.9
M6IN1
  Top 0.254: MSP1.29 69.95,12.51 69.95,11.25 68.25,9.55 U5.8
M6IN2
  Top 0.254: 68.76,7.19 U5.7 68.73,9.4 70.43,11.09 70.43,12.76 MSP1.30
M7IN1  (via drill 0.3)
  Top 0.254: U7.10 77.42,8.33 77.04,8.71 v75.67,8.71 | v75.67,9.98 74.6,9.98 MSP1.32
  Bottom 0.254: v75.67,8.71 v75.67,9.98
M7IN2
  Top 0.254: MSP1.31 74.52,9.35 76.94,9.35 77.93,8.67 U7.9
M8IN1
  Top 0.254: MSP1.33 74.37,10.94 75.67,10.94 76.85,10.3 78.44,9.12 U7.8
M8IN2
  Top 0.254: MSP1.46 74.96,19.48 74.04,20.4 75.67,22.02 77.8,22.02 81.25,18.57 81.25,14.86 82.88,13.23 81.66,11.96 78.92,9.22 U7.7
M1234SLEEP  (via drill 0.3)
  Top 0.254: U3.12 U3.11 46.41,10.01 arc-90 46.48,10.11 54.43,10.11 v54.28,10.31 54.38,10.82 54.48,10.92 54.48,11.71 59.96,11.71 MSP1.18 | U4.12 v54.23,7.16
  Top 0.305: U4.11 U4.12
  Bottom 0.254: v54.23,7.16 54.23,10.16 arc-90 v54.28,10.31
M5678SLEEP  (via drill 0.3)
  Top 0.254: 69.82,7.87 69.82,7.16 v69.88,7.16 69.88,7.87 74.4,7.87 | U5.11 U5.12 65.73,7.16 v65.25,7.16 | 74.4,7.87 76.43,7.87 U7.12 U7.11 | MSP1.34 74.1,11.89 v74.4,11.89 | v74.4,8.71 74.4,7.87
  Bottom 0.254: v69.88,7.16 v65.25,7.16 | v74.4,11.89 v74.4,8.71
N$1
  Top 0.406: U$5.VIN+ 8.42,30.62 U1.8
N$2  (via drill 0.3)
  Top 0.254: U$1.5 34.66,6.83 v35.23,6.83 | v37.92,4.24 38.89,4.24 R3.1
  Bottom 0.254: v35.23,6.83 37.92,6.83 v37.92,4.24
N$3
  Top 0.406: C1.1 7.96,32.62 U1.10
N$4
  Top 0.254: GREEN.C 46.78,12.72 R4.2
N$5
  Top 0.254: 26.07,28.98 R8.2
  Top 0.305: 26.07,28.98 LED0.C
N$6
  Top 0.305: LED1.C R9.2
N$7
  Top 0.254: MSP1.12 59.71,15.7
  Top 0.305: 59.71,15.7 59.16,15.7 | 59.16,15.7 58.55,15.09 L3.1 | 59.16,15.7 58.65,15.7 C32.+ 56.64,17.06 C31.2
N$8
  Top 0.254: MSP1.41 74.74,16.2 Q2.P2
  Top 0.305: C22.2 74.74,15.69 Q2.P2
N$9
  cutout Bottom: 73.13,14.74 73.76,15.38 73.76,16.65 72.49,17.92 72.49,18.55 73.13,19.19 73.76,19.19 75.03,17.92 76.3,18.24 77.89,16.65 77.89,15.06 81.06,11.89 79.48,10.3 75.98,13.79 74.71,13.47
N$10
  Top 0.254: MSP1.42 75.04,16.62 Q2.P1
  Top 0.305: C9.2 75.67,16.62 Q2.P1
N$13
  Top 0.254: U4.2 56.59,4.34 56.21,4.34 arc23 53.21,3.73 arc85 SV2.1
N$14
  Top 0.254: GPIO2.1 87.43,38.56 86.13,37.26 86.13,34.67 82.52,31.06 77.19,31.06 MSP1.61
N$15
  Top 0.254: GPIO2.2 88.39,36.02 82.88,30.51 77.35,30.51 MSP1.60
N$16
  Top 0.305: 56.57,4.32 55.02,4.22 | 55.02,4.22 53.77,3.96 52.22,2.21 | 55.02,4.22 52.4,3.66 53.72,3.96 52.45,2.9 53.32,3.56 52.5,2.74
N$17
  Top 0.203: COMPASS.10 86.45,7.3 86.45,8.01 86.63,8.39 86.63,9.4 C10.1
N$18
  Top 0.305: C16.2 40.61,20.72 MPU-6050.10
N$19
  Top 0.305: MPU-6050.20 33.48,21.22 C21.1
N$20
  Top 0.254: GPIO2.3 86.92,33.48 83.39,29.95 77.51,29.95 MSP1.59
N$21
  Top 0.254: GPIO2.4 85.5,30.94 84,29.34 77.69,29.34 MSP1.58
N$22
  Top 0.254: GPIO2.5 77.36,28.4 MSP1.57
N$23
  Top 0.254: GPIO2.6 84.63,25.86 82.93,27.56 77.25,27.56 MSP1.56
N$25
  Top 0.203: C13.2 88.28,7.13 COMPASS.8
N$27
  Top 0.254: MSP1.69 71.45,30.96 71.45,36.26 68.05,39.66 | 68.05,39.14 68.05,39.66 | 68.05,39.66 GPIO1.1
N$28
  Top 0.254: GPIO1.2 70.59,38.25 72.33,36.51 72.33,31.12 MSP1.68
N$30
  Top 0.254: GPIO1.3 73.13,31.24 MSP1.67
N$32
  Top 0.203: C13.1 arc90 88.04,10.34 85.37,10.34 85.36,8.59 85.28,8.41 85.28,7.78 COMPASS.12
N$33
  Top 0.254: R10.1 76.76,18.7 75.98,17.92 75.14,17.92 MSP1.44
N$34
  Top 0.254: MSP1.14 60.43,14.98
  Top 0.305: 60.43,14.98 60.43,14.43 59.82,13.82 L3.2
N$35
  Top 0.254: GPIO1.4 75.67,38.63 73.69,36.65 73.69,31.08 MSP1.66
N$36
  Top 0.254: GPIO1.5 78.21,38.58 74.35,34.72 74.35,31.02 MSP1.65
N$37
  Top 0.254: GPIO1.6 80.44,40.16 80.44,39.04 74.95,33.55 74.95,30.96 71.81,27.81 MSP1.64
N$38
  Top 0.254: GPIO1.8 85.83,39.29 84.71,38.18 82.47,38.18 76.07,31.78 76.07,30.66 72.52,27.11 MSP1.62
N$39
  Top 0.305: U4.3 57.1,4.19 56.95,3.89 55.32,3.02 SV2.2
N$40
  Top 0.305: SV2.3 57.66,2.16 U4.4
N$41
  Top 0.305: SV2.4 60.1,3.28 58.22,4.39 58.12,4.5 U4.5
N$42
  Top 0.254: U$1.6 35.92,9.7 C6.1
N$43
  Top 0.254: GPIO1.7 75.46,32.64 75.46,30.73 MSP1.63
N$44
  Top 0.254: RED.C 35.2,1.66 R6.2
N$45
  Top 0.305: U5.2 66.73,4.37 64.54,4.12 62.71,3.2 SV3.1
N$46
  Top 0.305: U5.3 67.23,4.17 67.08,3.96 65.61,3.25 SV3.2
N$47
  Top 0.305: U5.4 SV3.3
N$48
  Top 0.305: U5.5 68.25,4.57 70.33,3.2 SV3.4
N$49
  Top 0.305: U3.2 46.41,4.39 45.21,4.34 | 45.21,4.34 43.97,4.09 SV1.1 | 45.21,4.34 42.29,3.68 43.92,4.09 41.89,2.87 43.51,3.68 42.7,2.87
N$50
  Top 0.305: U3.3 46.91,4.24 46.81,4.04 46.46,3.83 | 46.46,3.83 45.14,2.87 45.14,3.28 | 45.14,3.28 45.14,3.68 46.46,3.83 | 46.46,3.83 45.14,3.28 | 45.14,3.28 SV1.2
N$51
  Top 0.305: U3.4 47.42,4.5 | 47.42,4.5 47.42,3.28 47.17,3.28 47.37,3.89 | 47.37,3.89 47.57,4.09 | 47.57,4.09 47.42,4.5 | 47.42,4.5 47.98,3.28 47.57,3.28 47.57,4.09 | 47.42,4.5 47.37,3.89 | 47.37,3.89 SV1.3
N$52
  Top 0.305: U3.5 47.93,4.6 49.4,3.48 48.03,4.5 49.55,3.71 49.1,3.83 SV1.4
N$53
  Top 0.305: U7.2 76.91,4.42 74.93,4.14 73.35,3.45 SV4.1
N$54
  Top 0.305: U7.3 77.42,4.17 76.71,3.61 SV4.2
N$55
  Top 0.305: U7.4 SV4.3
N$56
  Top 0.305: U7.5 78.44,4.57 80.62,3.15 SV4.4
N$57
  Top 0.305: 44.68,4.24 42.09,2.92 41.89,3.28
N$59
  Top 0.305: 57.1,5 57.1,4.14 57,3.94 56.64,3.73 | 56.64,3.73 55.32,2.77 55.32,3.17 | 55.32,3.17 55.32,3.58 56.64,3.73 | 56.64,3.73 55.32,3.17 | 55.32,3.17 55.14,2.24
N$60
  Top 0.305: 57.61,5 57.61,4.39 | 57.61,4.39 57.61,3.17 57.35,3.17 57.56,3.79 | 57.56,3.79 57.76,3.99 | 57.76,3.99 57.61,4.39 | 57.61,4.39 58.17,3.17 57.76,3.17 57.76,3.99 | 57.61,4.39 57.56,3.79 | 57.56,3.79 57.68,2.24
N$61
  Top 0.305: 58.12,5 58.12,4.5 59.59,3.38 58.22,4.39 60.2,3.58 59.28,3.73 60.22,2.24
N$63
  Top 0.305: 66.73,5.08 66.73,4.37 65.56,4.27 | 65.56,4.27 64.29,4.06 62.74,2.31 | 65.56,4.27 62.61,3.66 64.24,4.06 62.21,2.84 63.83,3.66 63.02,2.84
N$64
  Top 0.305: 67.23,5.08 67.23,4.22 67.13,4.01 66.78,3.81 | 66.78,3.81 65.46,2.84 65.46,3.25 | 65.46,3.25 65.46,3.66 66.78,3.81 | 66.78,3.81 65.46,3.25 | 65.46,3.25 65.28,2.31
N$65
  Top 0.305: 67.74,5.08 67.74,4.47 | 67.74,4.47 67.74,3.25 67.49,3.25 67.69,3.86 | 67.69,3.86 67.89,4.06 | 67.89,4.06 67.74,4.47 | 67.74,4.47 68.3,3.25 67.89,3.25 67.89,4.06 | 67.74,4.47 67.69,3.86 | 67.69,3.86 67.82,2.31
N$66
  Top 0.305: 68.25,5.08 68.25,4.57 69.72,3.45 68.35,4.47 70.33,3.66 69.42,3.81 70.36,2.31
N$67
  Top 0.305: 65,4.22 62.41,2.9 62.21,3.25
N$68
  Top 0.305: 76.91,5.03 76.91,4.37 75.74,4.27 | 75.74,4.27 74.47,4.06 72.92,2.31 | 75.74,4.27 72.8,3.66 74.42,4.06 72.39,2.84 74.02,3.66 73.2,2.84
N$69
  Top 0.305: 77.42,5.08 77.42,4.22 77.32,4.01 76.96,3.81 | 76.96,3.81 75.64,2.84 75.64,3.25 | 75.64,3.25 75.64,3.66 76.96,3.81 | 76.96,3.81 75.64,3.25 | 75.64,3.25 75.46,2.31
N$70
  Top 0.305: 77.93,5.08 77.93,4.47 | 77.93,4.47 77.93,3.25 77.67,3.25 77.88,3.86 | 77.88,3.86 78.08,4.06 | 78.08,4.06 77.93,4.47 | 77.93,4.47 78.49,3.25 78.08,3.25 78.08,4.06 | 77.93,4.47 77.88,3.86 | 77.88,3.86 78,2.31
N$71
  Top 0.305: 78.44,5.08 78.44,4.57 79.91,3.45 78.54,4.47 80.52,3.66 79.6,3.81 80.54,2.31
N$72
  Top 0.305: 74.93,4.14 72.59,2.9 72.39,3.25
N$75  (via drill 0.3)
  Top 0.254: MSP1.83 65.14,27.2 v65.3,27.2
  Bottom 0.254: v65.3,27.2 63.58,25.48 58.7,27.41 55.04,23.75 54.26,23.75 JP2.4
N$76
  Top 0.254: MSP1.94 58.32,26.26 JP2.6
N$77
  Top 0.254: MSP1.95 58.19,25.68 57.68,25.68 56.85,24.85 JP2.5
RFGND
  Top 0.61: U$4.RFGND 26.34,37.72 31.42,37.72 U$4.RFGND2
  Bottom 0.61: SJ2.2 24.81,40.33 U$4.RFGND
RX
  Top 0.254: MSP1.6 59.82,20.05 59.82,20.5 58.29,22.02 54.43,22.02 51.28,22.12 JP2.2
SCL  (via drill 0.5)
  Top 0.406: JP1.4 v5.21,8.89 v5.21,23.5 5.21,30.93 U$5.SCL | U9.5 v7.75,8.89 | v7.75,23.5 8.03,22.58 U2.6
  Bottom 0.406: v7.75,8.89 v5.21,8.89 | v5.21,23.5 v7.75,23.5
SCL1  (via drill 0.3)
  Top 0.254: COMPASS.1 83.69,4.25 v79.68,8.26 | v68.5,16.99 66.93,18.57 v62.36,18.57
  Top 0.305: RPUD.1 27.27,25.5 | 27.27,25.5 28.63,24.14 28.63,21.79 27.3,20.47 JP5.4 27.3,17.77 27.53,17.77 JP4.2 32.49,17.76 | v42.96,17.4 34.87,17.4 33.3,17.45 32.49,17.76 | MPU-6050.23 32.49,19.72 32.49,17.76 | IC1.4 28.86,25.82 27.27,25.5 | v47.32,17.35 52.5,16.03 v52.4,15.93 | v62.36,18.57 61.9,18.57 MSP1.11
  Bottom 0.254: v79.68,8.26 75.41,12.52 74.04,12.52 70.28,16.28 69.21,16.28 v68.5,16.99
  Bottom 0.305: v42.96,17.4 47.27,17.4 v47.32,17.35 | v52.4,15.93 59.82,15.93 v62.36,18.57
SDA
  Top 0.406: 6.48,17.78 6.48,6.35 7.75,6.35 | 6.48,17.78 6.48,28.53 U$5.SDA | U9.6 9.07,6.35 7.75,6.35 | JP1.3 7.75,6.35 | U2.1 6.93,17.78 6.48,17.78
SDA1  (via drill 0.3)
  Top 0.254: RPUC.1 24.7,26.68 24.7,26.95 | COMPASS.16 83.85,5 v79.83,9.02 | v69.32,17.91 67.89,19.48 v61.44,19.48
  Top 0.305: IC1.3 29.37,25.01 v29.1,24.89 | v27.3,24.36 26.07,24.36 arc-90 RPUC.1 26.04,24.4 26.04,21.59 JP5.3 24.77,17.82 24.69,17.82 JP4.1 26.09,16.46 31.8,16.46 v32.08,16.74 32.41,16.41 v43.68,16.41 | MPU-6050.24 33.71,19.22 v33.71,18.47 | v49.05,17.65 v53.21,16.74 | v61.44,19.48 61.44,18.83 MSP1.10
  Bottom 0.254: v79.83,9.02 75.72,13.13 74.24,13.13 v69.32,17.91
  Bottom 0.305: v29.1,24.89 27.61,24.36 v27.3,24.36 | v33.71,18.47 33.71,18.14 33.34,17.82 | 33.34,17.82 v32.08,16.74 32.26,16.74 33.34,17.82 | v43.68,16.41 47.8,16.41 v49.05,17.65 | v53.21,16.74 58.7,16.74 v61.44,19.48
SPI_EXTSLAVE_TE
  Top 0.254: MSP1.76 61.56,35.74 49.25,35.74 47.62,37.36 44.07,37.36 42.8,36.1 JP3.2
SPI_FLASH_CS
  Top 0.254: MSP1.80 60.96,33.5 49.96,33.5 49.45,32.99 49.45,28.02 48.03,26.49 37.06,26.49 35.74,27.81 35.74,30.35 35.84,30.46 | 35.84,30.46 37.06,31.67 37.87,31.67 U$3.CE | R16.1 34.72,31.57 35.84,30.46
SPI_MISO
  Top 0.254: MSP1.79 61.07,34.11 49.76,34.11 48.95,33.3 48.95,28.22 47.73,27 44.17,27 40.82,30.35 | 40.82,30.35 U$3.SO | JP3.4 37.73,33.95 39.9,31.78 39.9,31.17 40.82,30.35
SPI_MOSI
  Top 0.254: MSP1.78 61.18,34.72 49.66,34.72 48.44,33.5 48.44,28.93 47.32,27.81 U$3.SI 44.48,27.81 40.72,31.57 40.72,34.61 JP3.3
SPI_SCK
  Top 0.254: MSP1.77 61.39,35.23 49.35,35.23 47.83,33.71 47.83,29.44 47.47,29.08 U$3.SCK 45.96,29.13 44.27,29.13 44.27,33.99 JP3.1
TX  (via drill 0.3)
  Top 0.254: MSP1.7 58.55,18.06 58.19,17.96 55.45,20.6 55.14,20.9 | 55.14,20.9 55.05,21.01 JP2.3 | 55.14,20.9 55.04,21.01 v52.81,21.01 | v66.02,32.49 65.2,33.3 62.05,36.55 60.6,37.67 U$4.TXD
  Bottom 0.254: v52.81,21.01 53.42,21.01 58.8,26.39 63.48,24.66 63.88,24.66 66.02,26.8 66.02,27.61 64.49,29.13 64.49,30.96 v66.02,32.49
UV_EN
  Top 0.406: JP1.5 2.67,28.58 3.52,29.43 R1.1 3.52,34.29 14.73,34.29 14.73,29.62 U1.4
V_MOTOR  (via drill 0.3)
  Top 0.254: U7.1 76.43,5.22 74.14,5.22 v74.14,5.21 73.25,5.21 73.25,4.79 C24.2 | C28.2 44.41,6.78 | v54.1,4.89 54,4.79 C27.2 | v65.19,5.22 arc-90 v65.18,5.21 63.25,5.21 63.25,4.79 C26.2
  Top 0.305: U4.1 56.11,5.19 v54.1,4.89 | U5.1 66.24,5.22 v65.19,5.22 | C28.2 44.37,6.72 44.37,5.23 v44.5,5.1 U3.1
  Bottom 0.254: v74.14,5.21 73.25,5.21 73.25,4.6 71.54,4.6 71.54,4.58
  Bottom 0.305: 44.3,5.14 44.69,4.56 | v54.1,4.89 54.94,4.56 | v65.19,5.22 65.19,4.58 | SJ1.2 44.5,6.65 v44.5,5.1
  Bottom 0.61: SJ1.2 44.37,4.56 44.69,4.56 54.94,4.56 55.26,4.56 65.19,4.58 71.54,4.58

## Text on the board
tValues: MISO MOSI TE CLK | ML8511 | MCP3425 | Octanis 1 v0.4 | octanis.org | SCL | GND | Octanis 1 weather monitor v1 | www.octanis.org | HMC5883L | 3V3 GND SDA SCL UVEN | 5V |GND| 3.3V | GND | SDA | 3.3V
bValues: 3V3 V_mot 5V